# EAGLE board Erika (EAGLE 9.6.2)
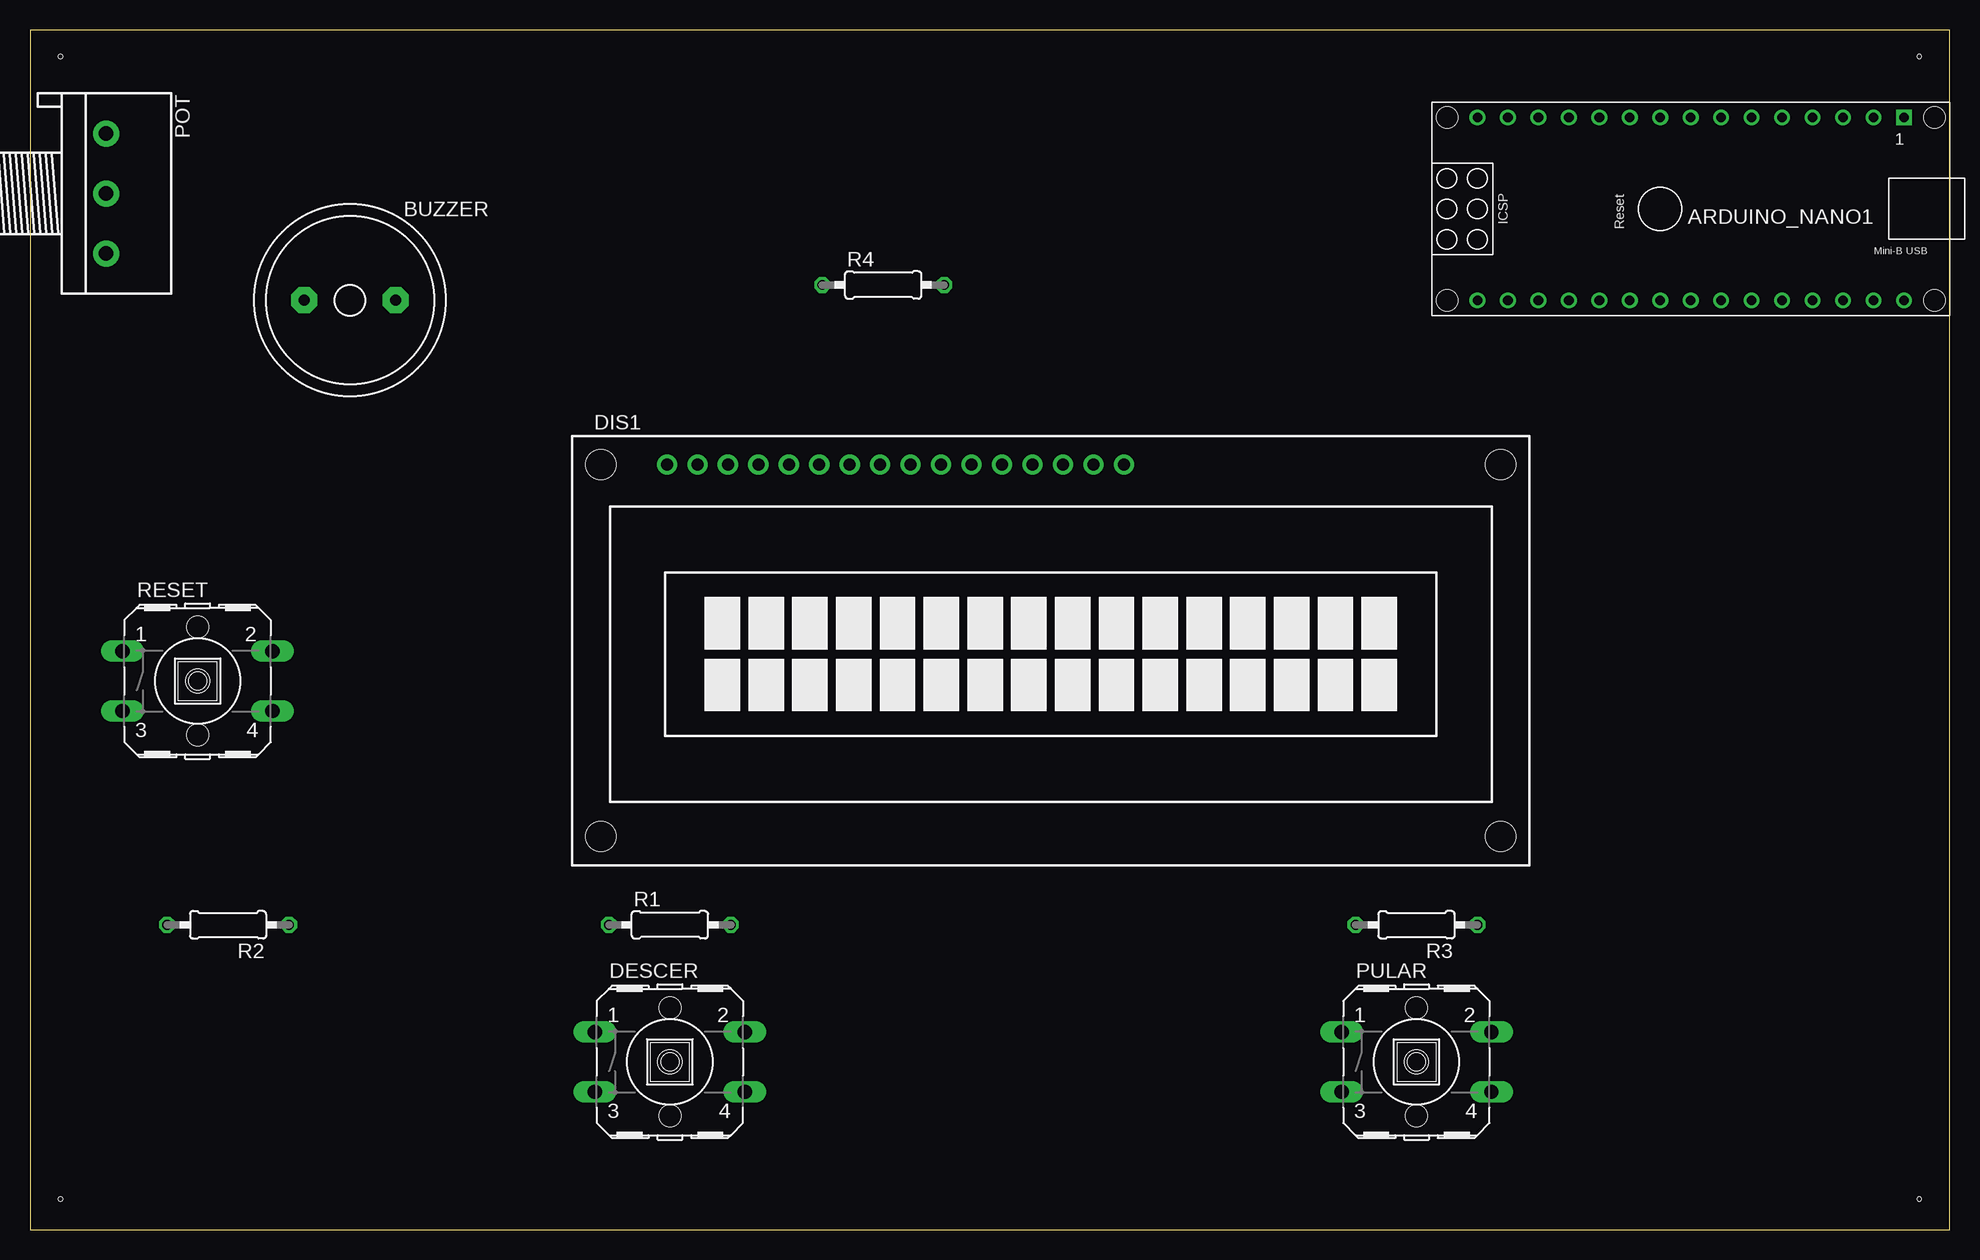
[diagram p0: board, top side]
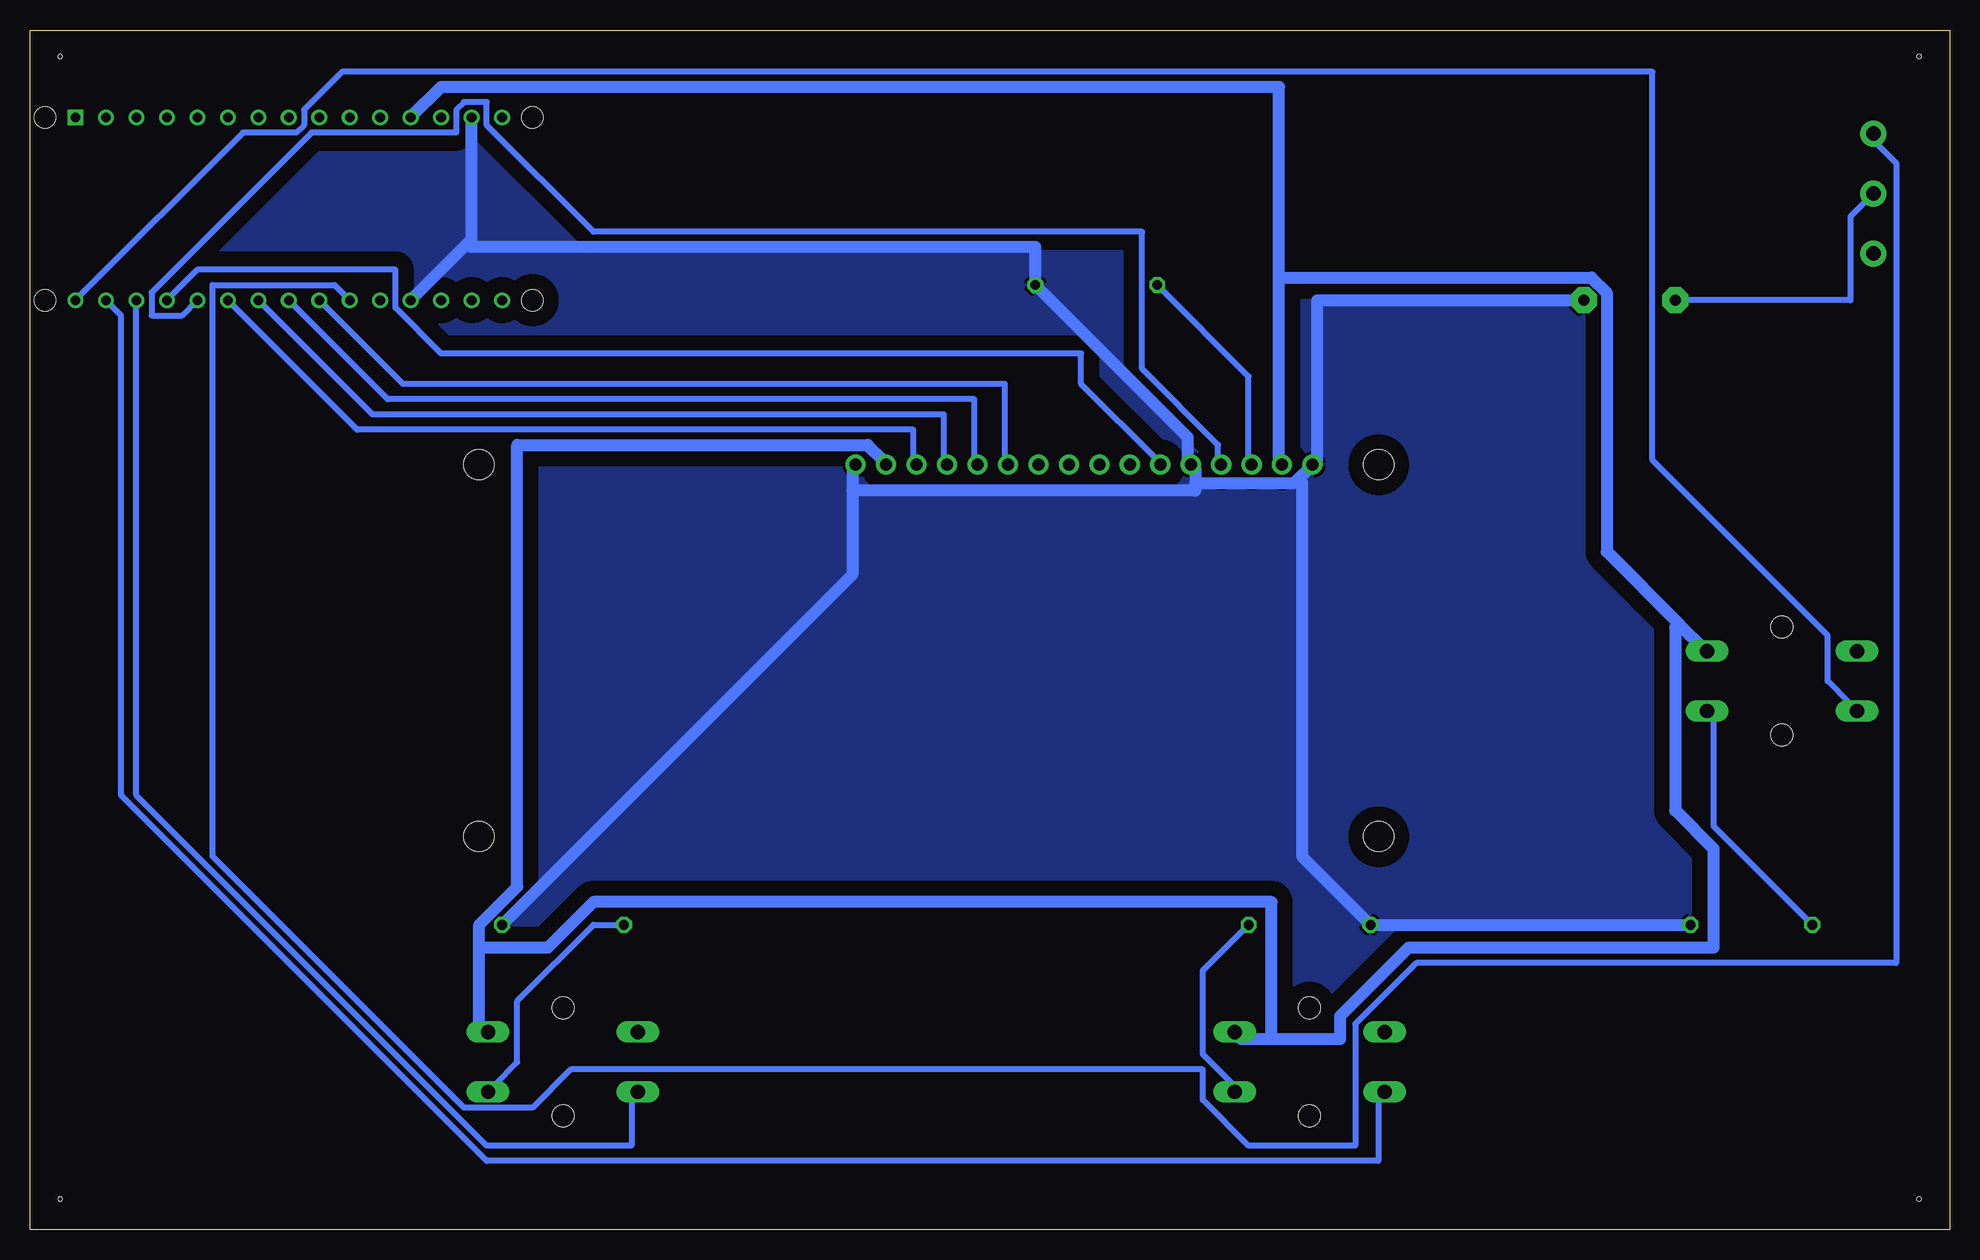
[diagram p1: board, bottom side, seen from below]

Size 160 x 100 mm. Coordinates in mm from the lower left corner, seen from the top.
Outline: 0,0 160,0 160,100 0,100 0,0
Copper layers (1*16): Top 0.035mm / dielectric 1.5mm / Bottom 0.035mm
Design rules "default": minimum track width 6mil, minimum drill 0.35mm, track to track 6mil, track to pad 6mil, pad to pad 6mil, via to via 6mil, smd to smd 6mil, copper to edge 40mil, drill to drill 6mil, minimum pad ring 10mil, minimum via ring 8mil, stop-mask expansion 4mil, vias tented up to drill 0mil, thermal gap 10mil
Net classes: 0 default: width 0.508 mm; 1 alimentação: width 1.016 mm
Holes 0.35 mm at 2.54,97.79 2.54,2.54 157.48,2.54 157.48,97.79

## Footprints (pad centres in the part's own frame; a part is rotated, then mirrored left to right if it is on the bottom)
ARDUINO_NANO = drill 0.8 square: 1 -20.32,-7.62 | drill 0.8: 2 -17.78,-7.62; 3 -15.24,-7.62; 4 -12.7,-7.62; 5 -10.16,-7.62; 6 -7.62,-7.62; 7 -5.08,-7.62; 8 -2.54,-7.62; 9 0,-7.62; 10 2.54,-7.62; 11 5.08,-7.62; 12 7.62,-7.62; 13 10.16,-7.62; 14 12.7,-7.62; 15 15.24,-7.62; 16 15.24,7.62; 17 12.7,7.62; 18 10.16,7.62; 19 7.62,7.62; 20 5.08,7.62; 21 2.54,7.62; 22 0,7.62; 23 -2.54,7.62; 24 -5.08,7.62; 25 -7.62,7.62; 26 -10.16,7.62; 27 -12.7,7.62; 28 -15.24,7.62; 29 -17.78,7.62; 30 -20.32,7.62 | hole 1.778: -22.86,-7.62; -22.86,7.62; 17.78,7.62; 17.78,-7.62
F/QMB = drill 0.914 pad 2.159 octagon: + 3.81,0; - -3.81,0
B3F-40XX = drill 1.194 long: 1 -6.248,2.489; 2 6.248,2.489; 3 -6.248,-2.489; 4 6.248,-2.489 | hole 1.803: 0,-4.496; 0,4.496
TUXGR_16X2_R2 = drill 1 pad 1.676: 1 -32,15.5; 2 -29.46,15.5; 3 -26.92,15.5; 4 -24.38,15.5; 5 -21.84,15.5; 6 -19.3,15.5; 7 -16.76,15.5; 8 -14.22,15.5; 9 -11.68,15.5; 10 -9.14,15.5; 11 -6.6,15.5; 12 -4.06,15.5; 13 -1.52,15.5; 14 1.02,15.5; 15 3.56,15.5; 16 6.1,15.5 | hole 2.5: -37.5,-15.5; 37.5,-15.5; -37.5,15.5; 37.5,15.5
3RP/1610N = drill 1.2 pad 2.184: 1 -5,0; 2 0,0; 3 5,0
0207/10 = drill 0.813 octagon: 1 -5.08,0; 2 5.08,0

## Placement (x,y rotation side)
ARDUINO_NANO1  [ARDUINO_NANO]  135.89,85.09 180 top
BUZZER  F/QMB  [F/QMB]  26.67,77.47 0 top
DESCER  [B3F-40XX]  53.34,13.97 0 top
DIS1  TUXGR_16X2_R2  [TUXGR_16X2_R2]  85.09,48.26 0 top
POT  [3RP/1610N]  6.35,86.36 270 top
PULAR  [B3F-40XX]  115.57,13.97 0 top
R1  [0207/10]  53.34,25.4 0 top
R2  [0207/10]  16.51,25.4 180 top
R3  [0207/10]  115.57,25.4 180 top
R4  [0207/10]  71.12,78.74 0 top
RESET  [B3F-40XX]  13.97,45.72 0 top

## Library data of the parts
ARDUINO_NANO1 = ArduinoNanoV30
BUZZER = buzzer; OC_FARNELL: unknown; OC_NEWARK: unknown
DESCER PULAR RESET = switch-omron; MF: OMRON COMPONENTS USA; MPN: B3F-4000; OC_FARNELL: 176434; OC_NEWARK: 36K3105
DIS1 = display-lcd; OC_FARNELL: unknown; OC_NEWARK: unknown
POT = pot
R1-R4 = rcl; SPICEPREFIX: R

## Nets
GND [alimentação]: ARDUINO_NANO1.14 ARDUINO_NANO1.19 BUZZER.+ DIS1.1 DIS1.5 DIS1.16 R1.1 R2.1 R3.1 R4.2
N$1: ARDUINO_NANO1.22 DIS1.11
N$2: DESCER.4 R1.2
N$3: ARDUINO_NANO1.28 PULAR.3
N$4: ARDUINO_NANO1.29 DESCER.3
N$5: ARDUINO_NANO1.30 RESET.3
N$6: BUZZER.- POT.2
N$7: ARDUINO_NANO1.23 DIS1.12
N$8: R2.2 RESET.4
N$10: PULAR.4 R3.2
N$11: DIS1.3 R4.1
N$12: ARDUINO_NANO1.24 DIS1.13
N$13: ARDUINO_NANO1.25 DIS1.14
N$14: ARDUINO_NANO1.26 DIS1.4
N$15: ARDUINO_NANO1.27 DIS1.6
N$16: ARDUINO_NANO1.21 POT.1
VCC [alimentação]: ARDUINO_NANO1.12 DESCER.2 DIS1.2 DIS1.15 PULAR.2 RESET.2
VIN: ARDUINO_NANO1.15

## Tracks (layer width: path | path; a pad name or v marks a point on that pad's centre or on a via)
GND
  Bottom 1.016: R3.1 91.44,54.61 91.44,61.59 | 91.44,61.59 91.44,63.5 DIS1.16 | R2.1 R1.1 53.98,31.11 53.98,62.23 54.29,62.55 | ARDUINO_NANO1.14 123.19,82.55 123.51,82.23 | ARDUINO_NANO1.19 123.51,82.23 | 54.29,62.55 54.61,62.23 62.87,62.23 | 54.29,62.55 53.34,63.5 DIS1.1 52.7,64.14 52.7,77.47 BUZZER.+ | 62.87,62.23 62.87,63.5 DIS1.5 63.5,64.14 63.5,66.04 R4.2 76.2,81.92 123.19,81.92 123.51,82.23 | 91.44,61.59 62.87,61.59 62.87,62.23
  pour Bottom (isolate 1.27): 1.27,99.06 1.27,1.27 158.75,1.27 158.75,99.06
N$1
  Bottom 0.508: ARDUINO_NANO1.22 128.91,70.48 78.74,70.48 78.74,64.14 DIS1.11
N$2
  Bottom 0.508: R1.2 62.23,21.59 62.23,14.61 59.69,12.06 DESCER.4
N$3
  Bottom 0.508: ARDUINO_NANO1.28 151.13,36.2 121.92,6.99 109.86,6.99 109.86,11.43 PULAR.3
N$4
  Bottom 0.508: ARDUINO_NANO1.29 152.4,76.2 152.4,36.2 121.92,5.71 47.62,5.71 47.62,11.43 DESCER.3
N$5
  Bottom 0.508: ARDUINO_NANO1.30 142.24,91.44 137.79,91.44 137.16,92.08 137.16,93.34 133.99,96.52 24.77,96.52 24.77,64.14 10.16,49.53 10.16,45.72 8.26,43.81 RESET.3
N$6
  Bottom 0.508: BUZZER.- 8.26,77.47 8.26,84.45 POT.2
N$7
  Bottom 0.508: ARDUINO_NANO1.23 130.18,69.22 81.28,69.22 81.28,64.14 DIS1.12
N$8
  Bottom 0.508: R2.2 19.68,33.66 19.68,43.18 RESET.4
N$10
  Bottom 0.508: R3.2 113.03,25.4 119.38,19.05 119.38,13.97 121.28,12.06 PULAR.4
N$11
  Bottom 0.508: R4.1 58.42,71.12 58.42,64.14 DIS1.3
N$12
  Bottom 0.508: ARDUINO_NANO1.24 131.44,67.94 83.82,67.94 83.82,64.14 DIS1.13
N$13
  Bottom 0.508: ARDUINO_NANO1.25 132.72,66.67 86.36,66.67 86.36,64.14 DIS1.14
N$14
  Bottom 0.508: ARDUINO_NANO1.26 147.32,76.2 149.86,76.2 149.86,78.11 136.53,91.44 124.46,91.44 124.46,93.34 123.83,93.98 121.92,93.98 121.92,92.08 113.03,83.19 67.31,83.19 67.31,71.75 60.96,65.41 60.96,64.14 DIS1.4
N$15
  Bottom 0.508: ARDUINO_NANO1.27 146.05,80.01 129.54,80.01 129.54,76.83 125.73,73.03 72.39,73.03 72.39,70.48 66.04,64.14 DIS1.6
N$16
  Bottom 0.508: ARDUINO_NANO1.21 134.62,78.74 144.78,78.74 144.78,31.11 123.83,10.16 118.11,10.16 114.94,13.34 62.23,13.34 62.23,10.79 58.42,6.99 49.53,6.99 49.53,17.14 44.45,22.23 4.45,22.23 4.45,88.9 6.35,90.81 POT.1
VCC
  Bottom 1.016: 122.56,23.5 122.56,17.14 121.92,16.51 PULAR.2 | 122.56,23.5 122.56,25.4 119.38,28.57 119.38,65.41 90.17,65.41 88.9,64.14 DIS1.15 | ARDUINO_NANO1.12 125.73,95.25 55.88,95.25 55.88,79.38 | 55.88,79.38 55.88,64.14 DIS1.2 | 22.54,50.48 28.57,56.52 28.57,78.11 29.84,79.38 55.88,79.38 | 22.54,50.48 20.32,48.26 RESET.2 | 56.52,15.88 50.8,15.88 50.8,17.78 45.09,23.5 19.68,23.5 19.68,31.75 22.86,34.92 22.86,50.16 22.54,50.48 | 56.52,15.88 59.05,15.88 DESCER.2 | 122.56,23.5 116.84,23.5 113.03,27.3 56.52,27.3 56.52,15.88